# Altium PCB V_5.PcbDoc
Units mil, origin at the board's own origin, x right, y up, seen from the top; angles counter-clockwise.
Board outline 6000 x 4000 mil, 2 copper layers (Top Layer, Bottom Layer); 6 components, 0 nets, 77 pads, 7 vias.
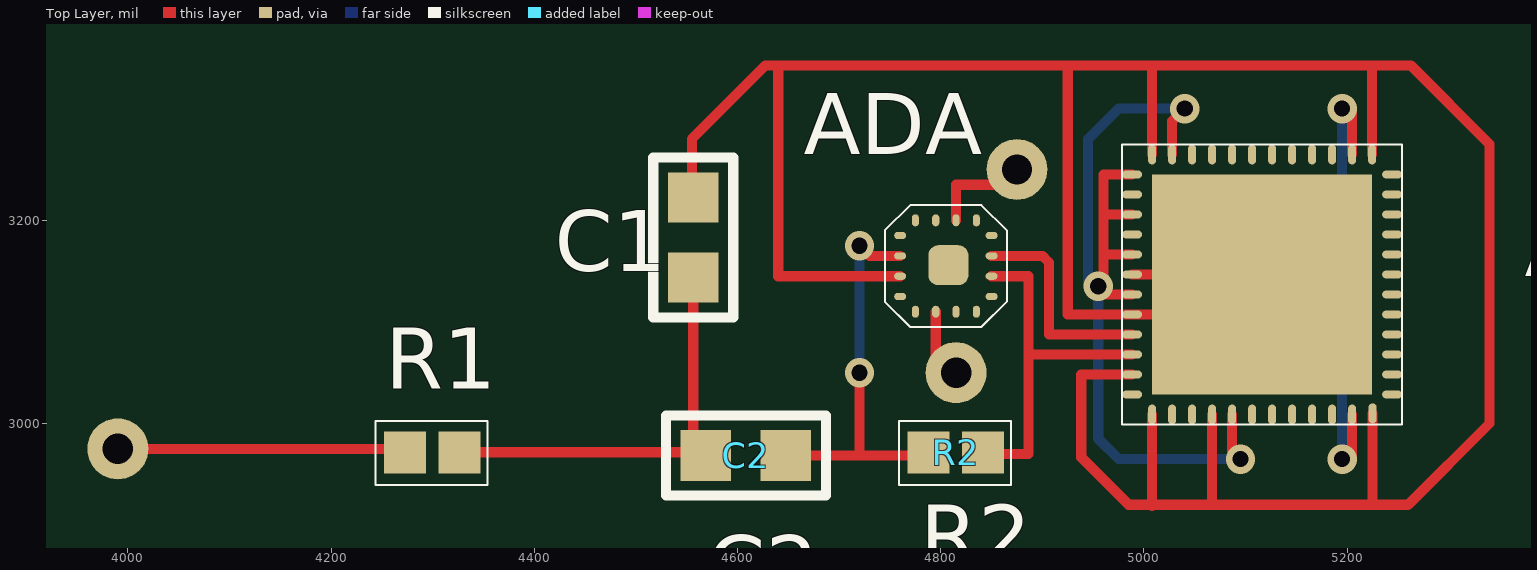
[diagram p0: Top Layer view]
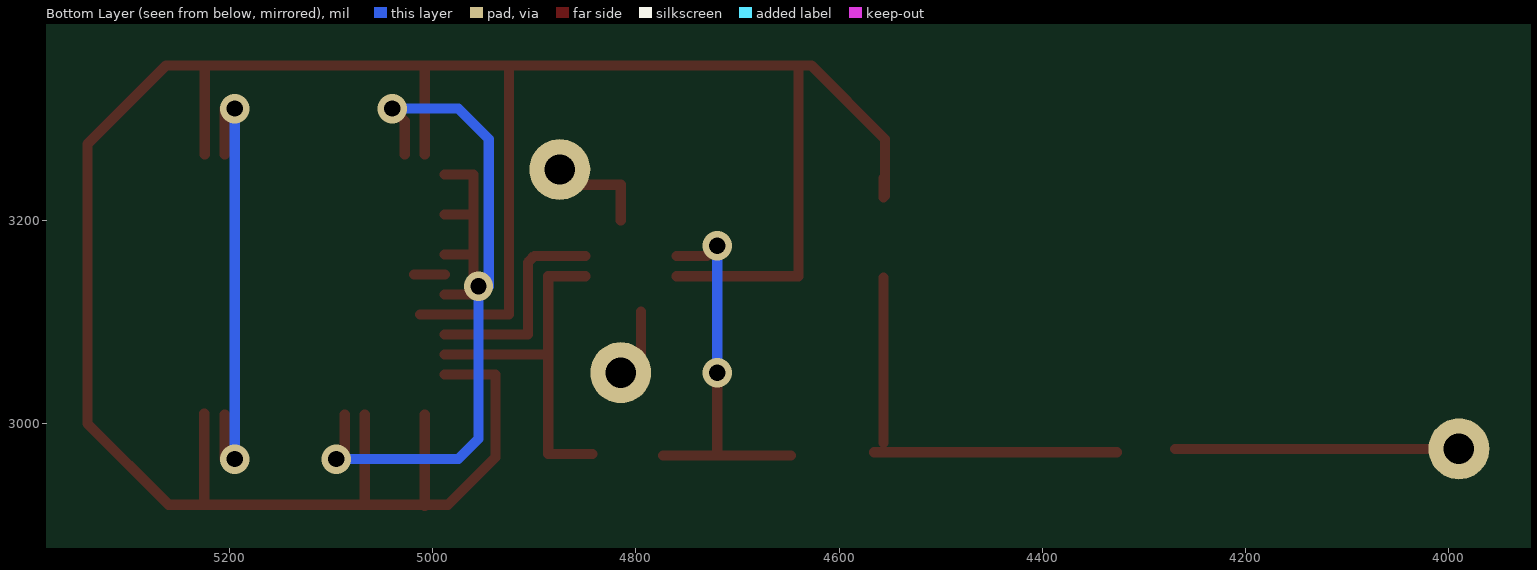
[diagram p1: Bottom Layer view, seen from below]

## Layer stack, top to bottom
Top Layer: signal copper 1.4
Dielectric: dielectric 12.6, FR-4, Dk 4.8
Bottom Layer: signal copper 1.4

## Board outline
1000,1000 7000,1000 7000,5000 1000,5000

## Design rules (kind name [scope] priority, off if disabled: settings)
Clearance [All] p1: gap=10
PolygonConnect [All] p1: connectstyle=Relief reliefconductorwidth=10 reliefentries=4 polygonreliefangle="90 Angle"
RoutingVias [All] p1: holewidth=28 width=50 viastyle="Through Hole" minholewidth=28 minwidth=50 maxholewidth=28 maxwidth=50
SilkscreenOverComponentPads [All] p1: minsilkscreentomaskgap=10
SolderMaskExpansion [All] p1: expansion=4
Width [All] p1: maxlimit=10 minlimit=10 preferedwidth=10
27 further rules are at their usual default settings.

## Components (designator, comment, footprint, x,y, rotation, side; value= is the part's Value field where it differs from the comment)
ADA "Comment" ADA 4820,3150 r0 top
ADC "Comment" ADC 5120,3145 r180 top
C1 "Comment" "Capacitor - duplicate"#1 4555,3180 r90 top
C2 "Comment" "Capacitor - duplicate"#2 4605,2970 r0 top
R1 "Comment" Resistor#1 4300,2970 r0 top
R2 "Comment" Resistor#2 4815,2970 r0 top

## Footprints (in the part's own frame and the unit in brackets; to place one, negate y for a bottom-side part, rotate by r counter-clockwise, add the part's x,y. Pads: shape width x height; smd on the part's side, far side on the other; paste and mask are expansions set on the pad)
ADA [mm]
  rrect50% 1x1 smd: 0(-0.319,0.147)
  oval 0.3x0.18 smd: 1(-1.524,0.889) 2(-1.524,0.381) 3(-1.524,-0.127) 4(-1.524,-0.635) 9(0.762,-0.635) 10(0.762,-0.127) 11(0.762,0.381) 12(0.762,0.889)
  oval 0.18x0.3 smd: 5(-1.143,-1.016) 6(-0.635,-1.016) 7(-0.127,-1.016) 8(0.381,-1.016) 13(0.381,1.27) 14(-0.127,1.27) 15(-0.635,1.27) 16(-1.143,1.27)
  silkscreen extent -1.91,-1.4 1.14,1.65
ADC [mm]
  rect 5.5x5.5 smd: 0(0.096,0.208)
  oval 0.2x0.5 smd: 1(-2.667,3.429) 2(-2.154,3.458) 3(-1.654,3.458) 4(-1.154,3.458) 5(-0.654,3.458) 6(-0.154,3.458) 7(0.346,3.458) 8(0.846,3.458) 9(1.346,3.458) 10(1.846,3.458) 11(2.346,3.458) 12(2.846,3.458) 25(2.846,-3.042) 26(2.346,-3.042) 27(1.846,-3.042) 28(1.346,-3.042) 29(0.846,-3.042) 30(0.346,-3.042) 31(-0.154,-3.042) 32(-0.654,-3.042) 33(-1.154,-3.042) 34(-1.654,-3.042) 35(-2.154,-3.042) 36(-2.654,-3.042)
  oval 0.5x0.2 smd: 13(3.346,2.958) 14(3.346,2.458) 15(3.346,1.958) 16(3.346,1.458) 17(3.346,0.958) 18(3.346,0.458) 19(3.346,-0.042) 20(3.346,-0.542) 21(3.346,-1.042) 22(3.346,-1.542) 23(3.346,-2.042) 24(3.346,-2.542) 37(-3.154,-2.542) 38(-3.154,-2.042) 39(-3.154,-1.542) 40(-3.154,-1.042) 41(-3.154,-0.542) 42(-3.154,-0.042) 43(-3.154,0.458) 44(-3.154,0.958) 45(-3.154,1.458) 46(-3.154,1.958) 47(-3.154,2.458) 48(-3.154,2.958)
  silkscreen extent -3.4,-3.29 3.6,3.71
"Capacitor - duplicate"#1 [mm]
  rect 1.26x1.27 smd: 0(1.079,-0.036) 2(-0.921,-0.036)
  silkscreen extent -1.92,-1.04 2.08,0.96
"Capacitor - duplicate"#2 [mm]
  rect 1.26x1.27 smd: 2(-0.921,-0.036) 3(1.079,-0.036)
  silkscreen extent -1.92,-1.04 2.08,0.96
Resistor#1 [mm]
  rect 1.05x1.05 smd: 0(-0.689,0.042) 2(0.671,0.042)
  silkscreen extent -1.43,-0.77 1.37,0.83
Resistor#2 [mm]
  rect 1.05x1.05 smd: 1(-0.689,0.042) 2(0.671,0.042)
  silkscreen extent -1.43,-0.77 1.37,0.83

## Free pads (board coordinates)
  round 60 hole 30: 0(3990,2975) 1(4875,3250) 2(4815,3050)

## Via types
v1: diameter 29, hole 16, Top Layer to Bottom Layer, 7 vias

## Nets (pads, with @x,y where several pads share a name; then routed paths per layer and width w, separated by ;. In a path a pad name is that pad's centre, name@x,y a point inside that pad or via, vN(x,y) a via of type N, cw(c..) or ccw(c..) an arc to the next point about the centre after c; other vN are vias at no path point)
pads on no net: ADA.0 ADA.1 ADA.2 ADA.3 ADA.4 ADA.5 ADA.6 ADA.7 ADA.8 ADA.9 ADA.10 ADA.11 ADA.12 ADA.13 ADA.14 ADA.15 ADA.16 ADC.0 ADC.1 ADC.2 ADC.3 ADC.4 ADC.5 ADC.6 ADC.7 ADC.8 ADC.9 ADC.10 ADC.11 ADC.12 ADC.13 ADC.14 ADC.15 ADC.16 ADC.17 ADC.18 ADC.19 ADC.20 ADC.21 ADC.22 ADC.23 ADC.24 ADC.25 ADC.26 ADC.27 ADC.28 ADC.29 ADC.30 ADC.31 ADC.32 ADC.33 ADC.34 ADC.35 ADC.36 ADC.37 ADC.38 ADC.39 ADC.40 ADC.41 ADC.42 ADC.43 ADC.44 ADC.45 ADC.46 ADC.47 ADC.48 C1.0 C1.2 C2.2 C2.3 R1.0 R1.2 R2.1 R2.2
copper on no net: | length 5958.9
  Top Layer w10: 4000,2975 4180,2975 4235,2975 4269.54,2975 ; 4326.43,2971.65 4525.87,2971.65 4565.68,2971.65 ; 4555,3223.9 4555,3280 4627.5,3352.5 4967.5,3352.5 ; 4556.42,2980.91 4556.42,3051.42 4556.42,3143.74 ; 4556.42,3222.48 4556.42,3241.42 ; 4640,3350 4640,3305 4640,3280 4640,3145 4760,3145 ; 4647.48,2968.58 4730,2968.58 4771.42,2968.58 4773.58,2968.58 ; 4720,2968.58 v1@4720,3040 ; v1(4720,3175) 4730,3165 4735,3165 4760,3165 ; 4795,3060 4795,3080 4795,3110 ; 4815,3200 4815,3235 4855,3235 ; 4843.08,2970 4886.43,2970 4886.43,3017.23 4886.43,3145 4850,3145 ; 4850,3165 4880,3165 4900,3165 4905,3160 4906.43,3158.57 4906.43,3087.9 ; 4886.43,3067.9 4937.1,3067.9 4988.25,3067.9 ; 4906.75,3087.58 4977.42,3087.58 4988.25,3087.58 ; 4925,3352.5 4925,3107.27 4988.25,3107.27 5012.73,3107.27 ; 4942.5,3352.5 5262.5,3352.5 5340,3275 5340,3206.25 5340,3171.88 5340,3103.12 5340,3068.75 5340,3000 5260,2920 4985,2920 4938.21,2966.79 4938.21,3048.21 4988.25,3048.21 ; v1@4960.06,3130.06 4960.06,3175 4960.06,3245.06 4988.25,3245.06 ; 4960.69,3205.69 4988.25,3205.69 ; 4961.39,3166.32 4971.32,3166.32 4988.25,3166.32 ; v1@4963.17,3126.95 4968.05,3126.95 4988.25,3126.95 ; 4989.25,3146.64 4988.25,3146.64 5018.36,3146.64 ; 5007.94,2925 5007.94,2918.97 5007.94,3008.84 ; 5007.94,3264.75 5007.94,3352.06 ; 5027.62,3264.75 5027.62,3297.62 v1(5040,3310) ; 5066.99,2920 5066.99,3008.84 ; 5086.68,3008.84 5086.68,2973.32 v1(5095,2965) ; v1@5204.79,2965.21 5204.79,3008.84 5204.79,3000.21 ; 5204.79,3264.75 v1@5204.79,3309.79 ; 5224.47,3264.75 5224.47,3350 ; 5225,2920 5225,3010
  Bottom Layer w10: v1@4720,3060 4720,3160 ; v1@4945,3135 4945,3280 4975,3310 v1(5040,3310) v1@5030,3310 ; v1@4955,3130 4955,2985 4975,2965 5055,2965 v1@5090,2965 ; v1@5195,2970 5195,2990 5195,3295 v1(5195,3310)
  other v1: 5195,2965 4720,3050 4955,3135